# Altium PCB RUMBA_V2.PcbDoc (part 2 of 2)
Units mm, origin at the board's own origin, x right, y up, seen from the top; angles counter-clockwise.
Board outline 135 x 75 mm, 2 copper layers (Top Layer, Bottom Layer); 186 components, 178 nets, 812 pads, 160 vias.
Unrouted connection lines stored in the file: 153.
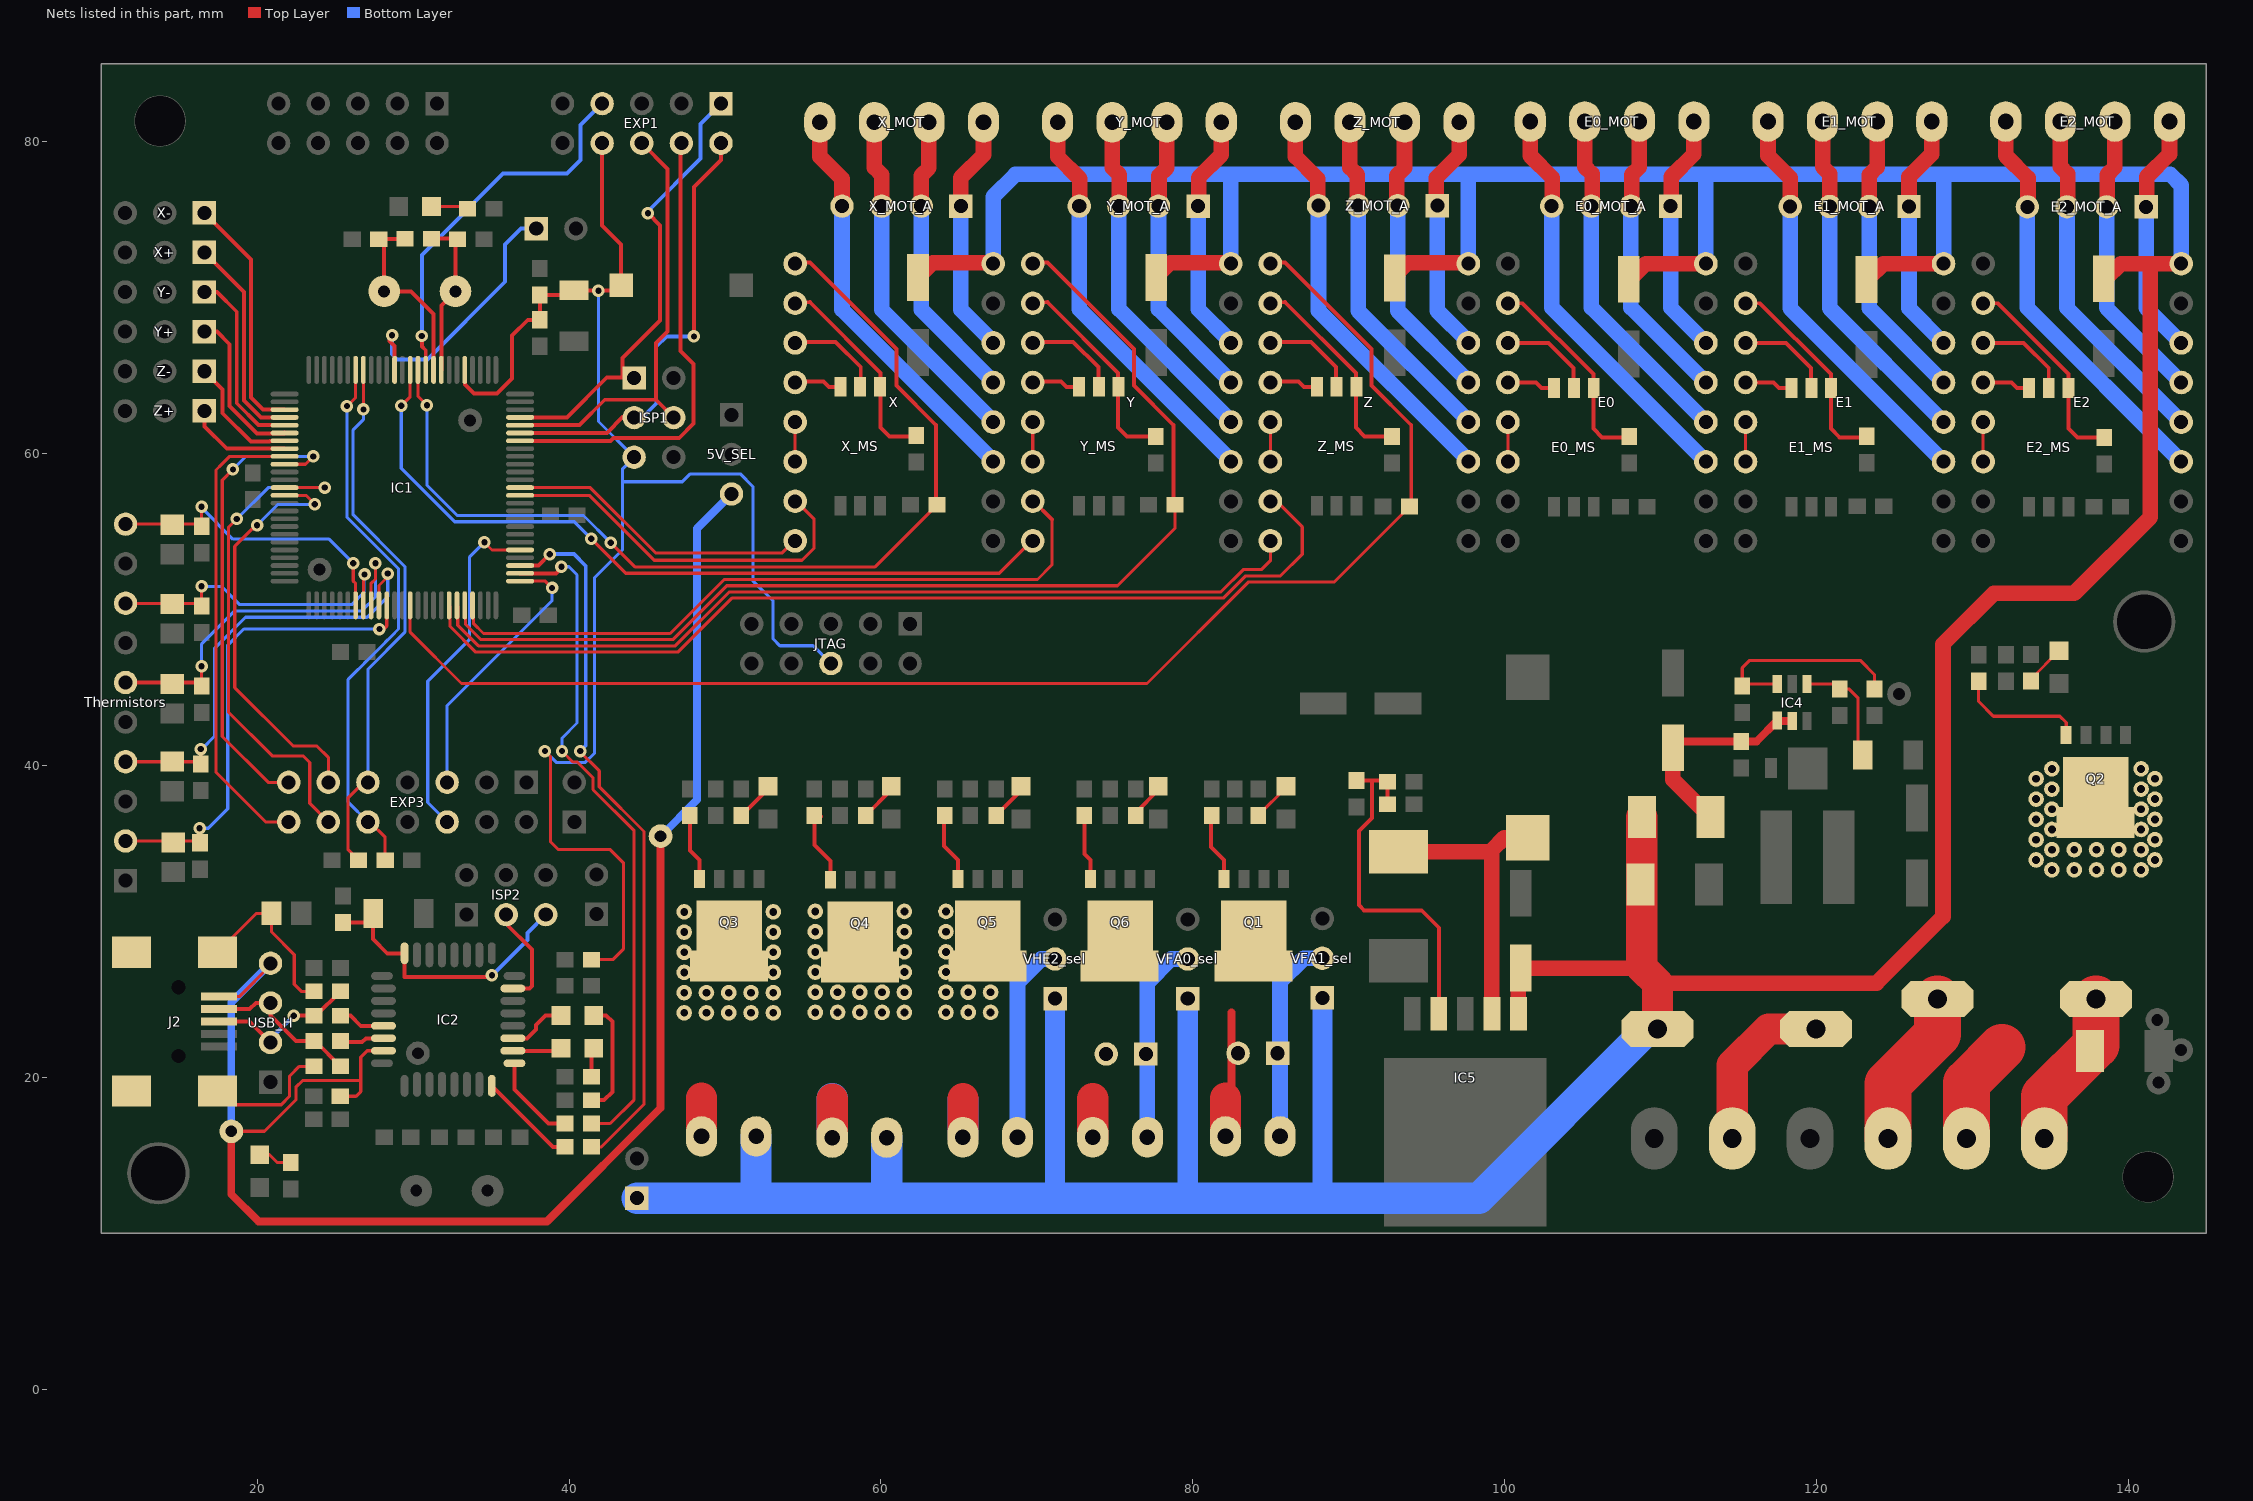
[diagram p2: the nets of this part, all layers, seen from the top]

## Via types
v1: diameter 0.8, hole 0.4, Top Layer to Bottom Layer, tented both sides, 160 vias

## Nets (pads, with @x,y where several pads share a name; then routed paths per layer and width w, separated by ;. In a path a pad name is that pad's centre, name@x,y a point inside that pad or via, vN(x,y) a via of type N, cw(c..) or ccw(c..) an arc to the next point about the centre after c; other vN are vias at no path point) (continued)
NetC18_2: C18.2 D4.2 IC4.1 | length 7.6
  Top Layer w0.2: IC4.1@119.39,45.219 121.163,45.219 C18.2@121.488,44.894 122.111,44.894 122.657,44.348 122.657,41.123 D4.2@123.165,40.615
NetC19_2: C19.2 IC1.33 R1.2 Y1.2 | length 10.5
  Top Layer w0.254: R1.2@31.178,73.782 C19.2@32.563,73.782 ; IC1.33@31.81,65.367 31.81,69.498 Y1.2@32.716,70.404 32.716,73.629 C19.2@32.563,73.782 ; C19.2@32.819,73.782 C19.2@32.563,73.782
NetC20_2: C20.2 IC1.34 R1.1 Y1.1 | length 12.4
  Top Layer w0.254: C20.2@27.799,73.752 C20.2@28.092,73.752 ; R1.1@29.448,73.752 C20.2@28.092,73.752 ; IC1.34@31.31,65.367 31.31,68.95 29.856,70.404 Y1.1@28.144,70.404 28.144,73.701 C20.2@28.092,73.752
NetC33_2: C33.2 IC5.4 R56.1 R57.1 | length 22.9
  Top Layer w0.254: R56.1@90.5,39.026 R57.1@92.433,39.026 ; 91.491,38.964 91.491,36.627 90.653,35.789 90.653,31.039 90.983,30.709 94.666,30.709 95.786,29.588 IC5.4@95.786,24.074 ; C33.2@92.496,37.516 R57.1@92.496,38.964
NetD8_2: D8.2 IC5.2 L4.1 | length 19.2
  Top Layer w0.254: 99.08,34.463 99.186,34.568
  Top Layer w1: D8.2@93.193,34.463 99.08,34.463 ; IC5.2@99.186,24.074 99.186,34.568 99.974,35.357 L4.1@101.498,35.357
NetE0_2: E0.2 E0_MS.1 R28.1 | length 13.4
  Top Layer w0.2: E0.2@100.211,69.636 101.153,69.636
  Top Layer w0.254: 101.153,69.636 105.688,65.102 105.688,64.204 105.688,61.596 106.252,61.032 R28.1@107.967,61.032
NetE0_3: E0.3 E0_MS.2 | length 6.2
  Top Layer w0.254: E0.3@100.211,67.096 102.804,67.096 104.418,65.483 E0_MS.2@104.418,64.204
NetE0_4: E0.4 E0_MS.3 | length 3.1
  Top Layer w0.254: E0.4@100.211,64.556 102.017,64.556 102.37,64.204 E0_MS.3@103.148,64.204
NetE0_5: E0.5 E0.6 | length 2.5
  Top Layer w0.2: E0.6@100.211,59.476 E0.5@100.211,62.016
NetE0_11: E0.11 E0_MOT.1 E0_MOT_A.4 | length 26.5
  Top Layer w1: E0_MOT.1@101.643,81.295 101.643,79.098 103.068,77.673 E0_MOT_A.4@103.068,75.921
  Bottom Layer w1: E0_MOT_A.4@103.022,75.87 103.022,69.365 E0.11@112.911,59.476
NetE0_12: E0.12 E0_MOT.2 E0_MOT_A.3 | length 22.5
  Top Layer w1: E0_MOT.2@105.143,81.295 105.143,78.392 105.608,77.927 E0_MOT_A.3@105.608,75.921
  Bottom Layer w1: E0_MOT_A.3@105.562,75.87 105.562,69.365 E0.12@112.911,62.016
NetE0_13: E0.13 E0_MOT.3 E0_MOT_A.2 | length 18.9
  Top Layer w1: E0_MOT_A.2@108.148,75.921 108.148,77.876 108.643,78.372 E0_MOT.3@108.643,81.295
  Bottom Layer w1: E0_MOT_A.2@108.102,75.87 108.102,69.365 E0.13@112.911,64.556
NetE0_14: E0.14 E0_MOT.4 E0_MOT_A.1 | length 15.7
  Top Layer w1: E0_MOT_A.1@110.688,75.921 110.688,77.749 112.143,79.205 E0_MOT.4@112.143,81.295
  Bottom Layer w1: E0_MOT_A.1@110.642,75.87 110.642,69.365 E0.14@112.911,67.096
NetE1_2: E1.2 E1_MS.1 R30.1 | length 13.4
  Top Layer w0.2: E1.2@115.451,69.636 116.393,69.636
  Top Layer w0.254: 116.393,69.636 120.928,65.102 120.928,64.204 120.928,61.596 121.492,61.032 R30.1@123.207,61.032
NetE1_3: E1.3 E1_MS.2 | length 6.2
  Top Layer w0.254: E1.3@115.451,67.096 118.044,67.096 119.658,65.483 E1_MS.2@119.658,64.204
NetE1_4: E1.4 E1_MS.3 | length 3.1
  Top Layer w0.254: E1.4@115.451,64.556 117.257,64.556 117.61,64.204 E1_MS.3@118.388,64.204
NetE1_5: E1.5 E1.6 | length 2.5
  Top Layer w0.2: E1.6@115.451,59.476 E1.5@115.451,62.016
NetE1_11: E1.11 E1_MOT.1 E1_MOT_A.4 | length 26.4
  Top Layer w1: E1_MOT.1@116.893,81.295 116.893,79.098 118.318,77.673 E1_MOT_A.4@118.318,75.921
  Bottom Layer w1: E1_MOT_A.4@118.313,75.844 118.313,69.314 E1.11@128.151,59.476
NetE1_12: E1.12 E1_MOT.2 E1_MOT_A.3 | length 22.4
  Top Layer w1: E1_MOT.2@120.393,81.295 120.393,78.392 120.858,77.927 E1_MOT_A.3@120.858,75.921
  Bottom Layer w1: E1_MOT_A.3@120.853,75.844 120.853,69.314 E1.12@128.151,62.016
NetE1_13: E1.13 E1_MOT.3 E1_MOT_A.2 | length 18.8
  Top Layer w1: E1_MOT_A.2@123.398,75.921 123.398,77.876 123.893,78.372 E1_MOT.3@123.893,81.295
  Bottom Layer w1: E1_MOT_A.2@123.393,75.844 123.393,69.314 E1.13@128.151,64.556
NetE1_14: E1.14 E1_MOT.4 E1_MOT_A.1 | length 15.6
  Top Layer w1: E1_MOT_A.1@125.938,75.921 125.938,77.749 127.393,79.205 E1_MOT.4@127.393,81.295
  Bottom Layer w1: E1_MOT_A.1@125.933,75.844 125.933,69.314 E1.14@128.151,67.096
NetE2_2: E2.2 E2_MS.1 R44.1 | length 13.4
  Top Layer w0.2: E2.2@130.691,69.636 131.633,69.636
  Top Layer w0.254: 131.633,69.636 136.168,65.102 E2_MS.1@136.168,64.204 136.168,61.596 136.732,61.032 R44.1@138.447,61.032
NetE2_3: E2.3 E2_MS.2 | length 6.2
  Top Layer w0.254: E2.3@130.691,67.096 133.284,67.096 134.898,65.483 E2_MS.2@134.898,64.204
NetE2_4: E2.4 E2_MS.3 | length 3.1
  Top Layer w0.254: E2.4@130.691,64.556 132.497,64.556 132.85,64.204 E2_MS.3@133.628,64.204
NetE2_5: E2.5 E2.6 | length 2.5
  Top Layer w0.2: E2.6@130.691,59.476 E2.5@130.691,62.016
NetE2_11: E2.11 E2_MOT.1 E2_MOT_A.4 | length 26.4
  Top Layer w1: E2_MOT.1@132.143,81.295 132.143,79.098 133.568,77.673 E2_MOT_A.4@133.568,75.921
  Bottom Layer w1: E2_MOT_A.4@133.528,75.819 133.528,69.339 E2.11@143.391,59.476
NetE2_12: E2.12 E2_MOT.2 E2_MOT_A.3 | length 22.4
  Top Layer w1: E2_MOT.2@135.643,81.295 135.643,78.392 136.108,77.927 E2_MOT_A.3@136.108,75.921
  Bottom Layer w1: E2_MOT_A.3@136.068,75.819 136.068,69.339 E2.12@143.391,62.016
NetE2_13: E2.13 E2_MOT.3 E2_MOT_A.2 | length 18.8
  Top Layer w1: E2_MOT_A.2@138.648,75.921 138.648,77.876 139.143,78.372 E2_MOT.3@139.143,81.295
  Bottom Layer w1: E2_MOT_A.2@138.608,75.819 138.608,69.339 E2.13@143.391,64.556
NetE2_14: E2.14 E2_MOT.4 E2_MOT_A.1 | length 15.6
  Top Layer w1: E2_MOT_A.1@141.188,75.921 141.188,77.749 142.643,79.205 E2_MOT.4@142.643,81.295
  Bottom Layer w1: E2_MOT_A.1@141.148,75.819 141.148,69.339 E2.14@143.391,67.096
NetF1_1: F1.1 HB-PWR.2 | length 10.3
  Top Layer w3: HB-PWR.2@124.583,16.078 124.583,19.58 127.762,22.758 F1.1@127.762,25.019
NetF2_1: F2.1 MAIN-PWR.2 | length 11
  Top Layer w2: MAIN-PWR.2@114.601,16.078 114.601,20.773 116.916,23.089 F2.1@119.964,23.089
NetFAN0_1: FAN0.1 FAN0_1.1 VFA0_sel.2 | length 13
  Bottom Layer w1: FAN0.1@77.089,16.154 77.089,26.06 78.613,27.584 VFA0_sel.2@79.502,27.584
NetFAN0_2: FAN0.2 FAN0_1.2 Q6.2 | length 2.5
  Top Layer w2: FAN0.2@73.589,16.154 73.589,18.623
NetFAN1_1: FAN1.1 FAN1_1.1 VFA1_sel.2 | length 13
  Bottom Layer w1: FAN1.1@85.598,16.205 85.598,26.111 87.122,27.635 VFA1_sel.2@88.011,27.635
NetFAN1_2: FAN1.2 FAN1_1.2 Q1.2 | length 8.1
  Top Layer w0.5: 82.098,18.674 82.493,19.069 82.493,24.155
  Top Layer w2: FAN1.2@82.098,16.205 82.098,18.674
NetHB-OUT_1: HB-OUT.1 pad.2@134.087,33.934 pad.2@134.087,35.236 pad.2@134.087,36.538 pad.2@134.087,37.84 pad.2@134.087,39.141 pad.2@135.103,33.299 pad.2@135.103,34.595 pad.2@135.103,35.89 pad.2@135.103,37.186 pad.2@135.103,38.481 pad.2@135.103,39.776 pad.2@136.531,33.299 pad.2@136.531,34.595 pad.2@137.96,33.299 pad.2@137.96,34.595 pad.2@139.389,33.299 pad.2@139.389,34.595 pad.2@140.818,33.299 pad.2@140.818,34.595 pad.2@140.818,35.89 pad.2@140.818,37.186 pad.2@140.818,38.481 pad.2@140.818,39.776 pad.2@141.707,33.934 pad.2@141.707,35.236 pad.2@141.707,36.538 pad.2@141.707,37.84 pad.2@141.707,39.141 Q2.2 | length 6.8
  Top Layer w3: HB-OUT.1@129.616,16.078 129.616,19.634 131.902,21.92
NetHE0_2: HE0.2 pad.2@47.384,24.13 pad.2@47.384,25.425 pad.2@47.384,26.721 pad.2@47.384,28.016 pad.2@47.384,29.312 pad.2@47.384,30.607 pad.2@48.812,24.13 pad.2@48.812,25.425 pad.2@50.241,24.13 pad.2@50.241,25.425 pad.2@51.67,24.13 pad.2@51.67,25.425 pad.2@53.099,24.13 pad.2@53.099,25.425 pad.2@53.099,26.721 pad.2@53.099,28.016 pad.2@53.099,29.312 pad.2@53.099,30.607 Q3.2 | length 4.9
  Top Layer w2: HE0.2@48.494,16.205 48.494,18.674
  Bottom Layer w2: HE0.2@48.494,16.205 48.494,18.613
NetHE1_2: HE1.2 pad.2@55.791,24.155 pad.2@55.791,25.451 pad.2@55.791,26.746 pad.2@55.791,28.042 pad.2@55.791,29.337 pad.2@55.791,30.632 pad.2@57.22,24.155 pad.2@57.22,25.451 pad.2@58.649,24.155 pad.2@58.649,25.451 pad.2@60.077,24.155 pad.2@60.077,25.451 pad.2@61.506,24.155 pad.2@61.506,25.451 pad.2@61.506,26.746 pad.2@61.506,28.042 pad.2@61.506,29.337 pad.2@61.506,30.632 Q4.2 | length 5
  Top Layer w2: HE1.2@56.876,16.129 56.876,18.598
  Bottom Layer w2: HE1.2@56.876,16.129 56.876,18.638
NetHE2_1: HE2.1 VHE2_sel.2 | length 13
  Bottom Layer w1: HE2.1@68.758,16.154 68.758,26.06 70.282,27.584 VHE2_sel.2@71.171,27.584
NetHE2_2: HE2.2 pad.2@64.173,24.155 pad.2@64.173,25.451 pad.2@64.173,26.746 pad.2@64.173,28.042 pad.2@64.173,29.337 pad.2@64.173,30.632 pad.2@65.602,24.155 pad.2@65.602,25.451 pad.2@67.031,24.155 pad.2@67.031,25.451 Q5.2 | length 4.9
  Top Layer w2: HE2.2@65.258,16.154 65.258,18.623
  Bottom Layer w2: HE2.2@65.258,16.154 65.258,18.573
NetIC2_8: IC2.8 R17.1 | length 6.3
  Top Layer w0.254: IC2.8@35.048,19.447 35.055,19.447 38.97,15.531 R17.1@39.734,15.531
NetIC2_9: IC2.9 R18.1 | length 5.8
  Top Layer w0.254: IC2.9@36.498,20.897 36.498,19.204 38.671,17.031 R18.1@39.734,17.031
NetIC2_10: IC2.10 RX.2 | length 3.2
  Top Layer w0.254: IC2.10@36.398,21.697 39.329,21.697 RX.2@39.489,21.857
NetIC2_11: IC2.11 TX.2 | length 3.9
  Top Layer w0.254: IC2.11@36.398,22.497 37.305,22.497 37.871,23.063 37.871,23.343 38.494,23.966 TX.2@39.489,23.966
NetIC2_29: IC2.29 R8.1 | length 3
  Top Layer w0.254: R8.1@25.348,23.947 25.99,23.947 26.64,23.297 IC2.29@28.098,23.297
NetIC2_30: IC2.30 R7.1 | length 2.9
  Top Layer w0.254: R7.1@25.348,22.324 25.421,22.25 26.721,22.25 26.967,22.497 IC2.30@28.098,22.497
NetIC4_3: IC4.3 R5.1 R6.2 | length 13.4
  Top Layer w0.2: R6.2@115.24,45.097 115.24,46.253 115.722,46.736 122.809,46.736 123.723,45.822 R5.1@123.723,44.894 ; R6.2@115.362,45.219 IC4.3@117.49,45.219
  Top Layer w0.5: R6.2@115.24,45.097 R6.2@115.362,45.219
NetJ2_0: J2.0 L1.1 Z1.2 Z2.2 | length 19.4
  Top Layer w0.2: J2.0@17.453,19.121 17.734,19.121 18.618,18.237 21.539,18.237 22.073,18.771 22.073,20.066 22.703,20.697 Z1.2@23.648,20.697 ; J2.0@17.453,28.021 19.937,30.505 L1.1@20.919,30.505 20.919,29.322 22.377,27.864 22.377,25.959 22.828,25.508 Z2.2@23.638,25.508
NetJ2_2: J2.2 R7.2 USB_H.3 Z1.1 | length 10.1
  Top Layer w0.254: J2.2@17.553,24.371 19.52,24.371 19.914,24.765 USB_H.3@20.853,24.765 20.853,23.952 22.482,22.324 R7.2@23.648,22.324 23.721,22.324 Z1.1@25.348,20.697
NetJ2_3: J2.3 R8.2 USB_H.2 Z2.1 | length 9.8
  Top Layer w0.254: J2.3@17.553,23.571 19.507,23.571 USB_H.2@20.853,22.225 ; v1(22.346,23.947) R8.2@23.648,23.947 23.776,23.947 Z2.1@25.338,25.508
  Bottom Layer w0.254: USB_H.2@20.853,22.225 20.853,22.454 v1(22.346,23.947)
NetLD2_1: LD2.1 R33.2 | length 2.7
  Top Layer w0.2: R33.2@133.756,45.403 133.756,45.542 LD2.1@135.56,47.346
NetLD3_1: LD3.1 R36.2 | length 2.6
  Top Layer w0.254: R36.2@51.053,36.793 52.756,38.496 LD3.1@52.756,38.659
NetLD4_1: LD4.1 R39.2 | length 2.5
  Top Layer w0.254: R39.2@59.029,36.793 60.658,38.422 LD4.1@60.658,38.659
NetLD5_1: LD5.1 R50.2 | length 2.5
  Top Layer w0.254: R50.2@67.386,36.793 68.99,38.397 LD5.1@68.99,38.659
NetLD6_1: LD6.1 R53.2 | length 2.5
  Top Layer w0.254: R53.2@76.352,36.793 76.352,36.98 77.778,38.406 LD6.1@77.778,38.659
NetLD7_1: LD7.1 R55.2 | length 2.6
  Top Layer w0.2: R55.2@84.201,36.793 LD7.1@85.979,38.571
  Top Layer w0.5: LD7.1@85.979,38.571 LD7.1@85.979,38.659
NetLED1_1: LED1.1 R13.1 | length 2.1
  Top Layer w0.2: LED1.1@31.183,75.844 R13.1@33.33,75.844
NetPower_1: Power.1 R4.1 | length 2.2
  Top Layer w0.2: Power.1@20.168,15.029 20.785,15.029 21.273,14.541 R4.1@22.149,14.541
NetQ1_1: Q1.1 R46.2 | length 4.5
  Top Layer w0.254: R46.2@81.404,36.793 81.178,36.568 81.178,34.77 82.017,33.932 Q1.1@82.017,32.727
NetQ2_1: Q2.1 R31.2 | length 8.3
  Top Layer w0.2: R31.2@130.404,45.392 130.404,44.094 131.343,43.155 135.611,43.155 136.017,42.748 Q2.1@136.017,41.935
NetQ3_1: Q3.1 R34.2 | length 4.3
  Top Layer w0.254: R34.2@47.751,36.793 47.751,34.545 48.364,33.932 Q3.1@48.364,32.727
NetQ4_1: Q4.1 R37.2 | length 4.7
  Top Layer w0.254: R37.2@56.156,36.73 55.753,36.327 55.753,34.885 56.769,33.869 Q4.1@56.769,32.664
NetQ5_1: Q5.1 R48.2 | length 4.5
  Top Layer w0.254: R48.2@64.336,36.793 64.059,36.516 64.059,34.822 64.949,33.932 Q5.1@64.949,32.727
NetQ6_1: Q6.1 R51.2 | length 4.3
  Top Layer w0.254: R51.2@72.819,36.793 73.05,36.561 73.05,34.313 73.432,33.932 Q6.1@73.432,32.727
NetR15_2: R15.2 TX.1 | length 7.4
  Top Layer w0.254: R15.2@41.434,18.531 42.254,18.531 42.774,19.05 42.774,23.571 42.379,23.966 TX.1@41.589,23.966
NetR16_2: R16.2 RX.1 | length 1.7
  Top Layer w0.254: R16.2@41.434,20.031 RX.1@41.434,21.702
NetR22_1: R22.1 X.2 X_MS.1 | length 13.4
  Top Layer w0.2: X.2@54.499,69.705 55.442,69.705
  Top Layer w0.254: 55.442,69.705 59.976,65.17 59.976,64.272 59.976,61.665 60.541,61.101 R22.1@62.255,61.101
NetR24_1: R24.1 Y.2 Y_MS.1 | length 13.4
  Top Layer w0.2: Y.2@69.739,69.705 70.682,69.705
  Top Layer w0.254: 70.682,69.705 75.216,65.17 75.216,64.272 75.216,61.665 75.781,61.101 R24.1@77.495,61.101
NetR26_1: R26.1 Z.2 Z_MS.1 | length 13.4
  Top Layer w0.2: Z.2@84.979,69.705 85.922,69.705
  Top Layer w0.254: 85.922,69.705 90.456,65.17 90.456,64.272 90.456,61.665 91.021,61.101 R26.1@92.735,61.101
NetX_3: X.3 X_MS.2 | length 6.2
  Top Layer w0.254: X.3@54.499,67.165 57.093,67.165 58.706,65.551 X_MS.2@58.706,64.272
NetX_4: X.4 X_MS.3 | length 3.1
  Top Layer w0.254: X.4@54.499,64.625 56.305,64.625 56.658,64.272 X_MS.3@57.436,64.272
NetX_5: X.5 X.6 | length 2.5
  Top Layer w0.2: X.6@54.499,59.545 X.5@54.499,62.085
NetX_11: X.11 X_MOT.1 X_MOT_A.4 | length 26.3
  Top Layer w1: X_MOT.1@56.081,81.244 56.081,79.047 57.506,77.622 X_MOT_A.4@57.506,75.87
  Bottom Layer w1: X_MOT_A.4@57.506,75.87 57.506,69.238 X.11@67.199,59.545
NetX_12: X.12 X_MOT.2 X_MOT_A.3 | length 22.3
  Top Layer w1: X_MOT.2@59.581,81.244 59.581,78.341 60.046,77.876 X_MOT_A.3@60.046,75.87
  Bottom Layer w1: X_MOT_A.3@60.046,75.87 60.046,69.238 X.12@67.199,62.085
NetX_13: X.13 X_MOT.3 X_MOT_A.2 | length 18.7
  Top Layer w1: X_MOT_A.2@62.586,75.87 62.586,77.826 63.081,78.321 X_MOT.3@63.081,81.244
  Bottom Layer w1: X_MOT_A.2@62.586,75.87 62.586,69.238 X.13@67.199,64.625
NetX_14: X.14 X_MOT.4 X_MOT_A.1 | length 15.5
  Top Layer w1: X_MOT_A.1@65.126,75.87 65.126,77.699 66.581,79.154 X_MOT.4@66.581,81.244
  Bottom Layer w1: X_MOT_A.1@65.126,75.87 65.126,69.238 X.14@67.199,67.165
NetY_3: Y.3 Y_MS.2 | length 6.2
  Top Layer w0.254: Y.3@69.739,67.165 72.333,67.165 73.946,65.551 Y_MS.2@73.946,64.272
NetY_4: Y.4 Y_MS.3 | length 3.1
  Top Layer w0.254: Y.4@69.739,64.625 71.545,64.625 71.898,64.272 Y_MS.3@72.676,64.272
NetY_5: Y.5 Y.6 | length 2.5
  Top Layer w0.2: Y.6@69.739,59.545 Y.5@69.739,62.085
NetY_11: Y.11 Y_MOT.1 Y_MOT_A.4 | length 28.1
  Top Layer w1: Y_MOT.1@71.331,81.244 71.331,79.047 72.756,77.622 ; 72.756,77.622 72.756,75.87 72.756,77.622
  Bottom Layer w1: Y_MOT_A.4@72.72,75.87 72.72,69.264 Y.11@82.439,59.545
NetY_12: Y.12 Y_MOT.2 Y_MOT_A.3 | length 24.3
  Top Layer w1: Y_MOT.2@74.831,81.244 74.831,78.341 75.296,77.876 ; 75.296,77.876 75.296,75.87 75.296,77.876
  Bottom Layer w1: Y_MOT_A.3@75.26,75.87 75.26,69.264 Y.12@82.439,62.085
NetY_13: Y.13 Y_MOT.3 Y_MOT_A.2 | length 20.7
  Top Layer w1: Y_MOT.3@78.331,81.244 78.331,78.321 77.836,77.826 ; 77.836,77.826 77.836,75.87 77.836,77.826
  Bottom Layer w1: Y_MOT_A.2@77.8,75.87 77.8,69.264 Y.13@82.439,64.625
NetY_14: Y.14 Y_MOT.4 Y_MOT_A.1 | length 17.4
  Top Layer w1: Y_MOT.4@81.831,81.244 81.831,79.154 80.376,77.699 ; 80.376,77.699 80.376,75.87 80.376,77.699
  Bottom Layer w1: Y_MOT_A.1@80.34,75.87 80.34,69.264 Y.14@82.439,67.165
NetZ_3: Z.3 Z_MS.2 | length 6.2
  Top Layer w0.254: Z.3@84.979,67.165 87.573,67.165 89.186,65.551 Z_MS.2@89.186,64.272
NetZ_4: Z.4 Z_MS.3 | length 3.1
  Top Layer w0.254: Z.4@84.979,64.625 86.785,64.625 87.138,64.272 Z_MS.3@87.916,64.272
NetZ_5: Z.5 Z.6 | length 2.5
  Top Layer w0.2: Z.6@84.979,59.545 Z.5@84.979,62.085
NetZ_11: Z.11 Z_MOT.1 Z_MOT_A.4 | length 28.1
  Top Layer w1: Z_MOT.1@86.581,81.244 86.581,79.047 88.006,77.622 ; 88.006,77.622 88.006,75.895 88.006,75.87 88.006,77.622
  Bottom Layer w1: Z_MOT_A.4@88.062,75.895 88.062,69.162 Z.11@97.679,59.545
NetZ_12: Z.12 Z_MOT.2 Z_MOT_A.3 | length 24.3
  Top Layer w1: Z_MOT.2@90.081,81.244 90.081,78.341 90.546,77.876 ; 90.546,77.876 90.546,75.895 90.546,75.87 90.546,77.876
  Bottom Layer w1: Z_MOT_A.3@90.602,75.895 90.602,69.162 Z.12@97.679,62.085
NetZ_13: Z.13 Z_MOT.3 Z_MOT_A.2 | length 20.7
  Top Layer w1: Z_MOT.3@93.581,81.244 93.581,78.321 93.086,77.826 ; 93.086,77.826 93.086,75.895 93.086,75.87 93.086,77.826
  Bottom Layer w1: Z_MOT_A.2@93.142,75.895 93.142,69.162 Z.13@97.679,64.625
NetZ_14: Z.14 Z_MOT.4 Z_MOT_A.1 | length 17.4
  Top Layer w1: Z_MOT.4@97.081,81.244 97.081,79.154 95.626,77.699 ; 95.626,77.699 95.626,75.895 95.626,75.87 95.626,77.699
  Bottom Layer w1: Z_MOT_A.1@95.682,75.895 95.682,69.162 Z.14@97.679,67.165
PB1_(SCK): EXP1.2 IC1.20 ISP1.3 | length 28.2
  Top Layer w0.254: IC1.20@36.86,61.317 42.419,61.317 ISP1.3@43.434,62.332 ; v1(48.006,67.513) 48.006,77.089 49.743,78.826 EXP1.2@49.743,79.904
  Bottom Layer w0.254: ISP1.3@44.171,62.306 44.704,62.306 45.593,63.195 45.593,66.853 46.253,67.513 v1(48.006,67.513)
PB2_(MOSI): EXP1.6 IC1.21 ISP1.4 | length 28.4
  Top Layer w0.254: IC1.21@36.86,61.817 40.659,61.817 42.291,63.449 45.568,63.449 ; EXP1.6@44.663,79.904 46.304,78.262 46.304,67.818 45.568,67.081 45.568,63.449 ; ISP1.4@46.711,62.306 45.568,63.449
PB3_(MISO): EXP1.1 IC1.22 ISP1.1 | length 28.5
  Top Layer w0.254: IC1.22@36.86,62.317 39.863,62.317 42.418,64.872 43.434,64.872 43.434,66.116 45.847,68.529 45.847,74.625 v1(45.06,75.413)
  Bottom Layer w0.254: v1(45.06,75.413) 45.06,75.54 48.438,78.918 48.438,81.139 EXP1.1@49.743,82.444
PC6: EXP3.14 IC1.59 | length 30.5
  Top Layer w0.2: 17.983,59.563 17.729,59.309 ; IC1.59@21.76,59.817 18.237,59.817 17.729,59.309 ; EXP3.14@22.022,36.373 20.549,36.373 17.36,39.561 17.36,58.94 17.729,59.309
PC7: EXP3.13 IC1.60 | length 30.4
  Top Layer w0.2: v1(18.44,58.979) 17.76,58.298 17.76,45.237 17.76,41.854 20.701,38.913 EXP3.13@22.022,38.913 ; IC1.60@21.76,59.317 23.097,59.317 v1(23.597,59.817)
  Bottom Layer w0.2: v1(18.44,58.979) 19.279,59.817 v1(23.597,59.817)
PJ0: EXP3.12 IC1.63 | length 33.3
  Top Layer w0.2: v1(18.694,55.804) 18.16,55.269 18.16,43.41 20.955,40.615 21.59,40.615 ; IC1.63@21.76,57.817 v1(24.327,57.817) ; 22.377,40.615 21.59,40.615 ; EXP3.12@24.562,36.373 23.368,37.567 23.368,40.183 22.936,40.615 21.59,40.615
  Bottom Layer w0.2: v1(18.694,55.804) 20.708,57.817 v1(24.327,57.817)
PJ1: EXP3.11 IC1.64 | length 27.1
  Top Layer w0.2: v1(19.99,55.397) 19.99,55.169 19.685,55.169 18.56,54.044 18.56,44.991 22.303,41.248 23.827,41.248 24.562,40.513 EXP3.11@24.562,38.913 ; IC1.64@21.76,57.317 23.125,57.317 v1(23.698,56.744)
  Bottom Layer w0.2: v1(19.99,55.397) 21.336,56.744 v1(23.698,56.744)
PS_ON: IC1.39 PS_ON.1 | length 17.9
  Top Layer w0.254: v1(28.651,67.586) 28.489,67.424 28.489,67.206 28.81,66.885 IC1.39@28.81,65.367
  Bottom Layer w0.254: v1(28.651,67.586) 28.651,66.37 28.981,66.04 30.912,66.04 35.89,71.018 35.89,73.406 36.906,74.422 PS_ON.1@37.897,74.422
PWM_1: EXP3.5 IC1.1 | length 17.5
  Top Layer w0.2: IC1.1@36.86,51.817 38.48,51.817 v1(38.913,51.384)
  Bottom Layer w0.2: EXP3.5@32.182,38.913 32.182,43.84 38.913,50.571 v1(38.913,51.384)
PWM_2: EXP3.6 IC1.5 | length 22.4
  Top Layer w0.2: v1(34.569,54.305) 35.058,53.817 IC1.5@36.86,53.817
  Bottom Layer w0.2: EXP3.6@32.182,36.373 30.937,37.617 30.937,45.394 33.604,48.061 33.604,53.34 v1(34.569,54.305)
RESET: C8.2 C16.1 D2.1 EXP1.8 IC1.30 ISP1.5 JTAG.6 R11.1 Reset.2 | length 104.6
  Top Layer w0.2: v1(38.456,40.919) 38.811,40.564 38.811,35.103 39.319,34.595 42.647,34.595 43.485,33.757 43.485,28.219 42.811,27.546 C16.1@41.45,27.546
  Top Layer w0.254: IC1.30@33.31,65.367 33.333,65.344 33.333,64.419 33.612,64.14 33.625,64.14 33.909,63.856 35.382,63.856 36.347,64.821 36.347,67.564 37.362,68.579 R11.1@38.132,68.579 C8.2@38.132,70.162 ; C8.2@38.125,70.168 40.026,70.168 D2.1@40.324,70.467 Reset.2@43.307,70.467 ; EXP1.8@42.123,79.904 42.123,74.627 43.343,73.406 Reset.2@43.343,70.79
  Bottom Layer w0.2: v1(38.456,40.919) 39.181,40.194 41.043,40.194 41.64,40.791 41.64,42.164 ; 41.64,41.648 41.64,42.164 ; v1(41.885,70.434) 41.885,62.052 ISP1.5@44.171,59.766 43.434,59.03 43.434,58.191 ; JTAG.6@56.794,46.533 55.651,47.676 53.518,47.676 53.086,48.108 53.086,50.546 51.791,51.841 51.791,57.887 50.978,58.699 47.777,58.699 47.269,58.191 43.434,58.191 ; 41.64,42.164 41.64,52.054 43.434,53.848 43.434,58.191
RESET2: D3.1 IC2.24 ISP2.5 R12.1 | length 17.9
  Top Layer w0.254: R12.1@25.502,29.935 D3.1@26.862,29.935 ; D3.1@27.433,30.505 27.433,28.854 28.34,27.947 IC2.24@29.448,27.947 29.448,26.432 34.941,26.432 v1(35.052,26.543)
  Bottom Layer w0.254: v1(35.052,26.543) 35.077,26.543 37.338,28.804 37.338,29.261 ISP2.5@38.506,30.429
SCK2: IC2.15 ISP2.3 | length 6.5
  Top Layer w0.254: ISP2.3@35.966,30.429 35.966,29.845 37.617,28.194 37.617,25.857 37.457,25.697 IC2.15@36.398,25.697
SCL: EXP3.9 IC1.43 R3.1 | length 35.1
  Top Layer w0.2: R3.1@26.504,33.909 25.832,34.581 25.832,37.922 26.822,38.913 EXP3.9@27.102,38.913 ; v1@26.797,62.814 v1(26.81,62.827) IC1.43@26.81,65.367
  Bottom Layer w0.2: v1(26.81,62.827) 26.81,62.173 26.156,61.519 26.156,56.071 29.472,52.755 29.472,48.547 27.102,46.177 EXP3.9@27.102,38.862
SD_CSEL: EXP1.4 IC1.19 | length 29.9
  Top Layer w0.254: IC1.19@36.86,60.817 42.656,60.817 42.85,61.011 46.66,61.011 47.066,61.011 47.981,61.925 47.981,65.735 47.142,66.573 47.142,79.844 EXP1.4@47.203,79.904
SD_DET: EXP1.7 IC1.35 | length 24.4
  Top Layer w0.254: v1(30.556,67.539) 30.556,66.878 30.81,66.624 IC1.35@30.81,65.367
  Bottom Layer w0.254: v1(30.556,67.539) 30.556,72.746 35.763,77.953 39.878,77.953 40.742,78.816 40.742,81.063 EXP1.7@42.123,82.444
SDA: EXP3.10 IC1.44 R2.1 | length 36.4
  Top Layer w0.2: v1(25.756,63.043) 26.31,63.597 IC1.44@26.31,65.367 ; EXP3.10@27.102,36.373 27.229,36.373 28.208,35.394 R2.1@28.208,33.909
  Bottom Layer w0.2: v1(25.756,63.043) 25.756,55.905 29.058,52.603 ; 26.899,46.584 27.165,46.85 ; EXP3.10@27.102,36.373 25.832,37.643 25.832,45.517 27.165,46.85 ; 28.219,47.904 28.608,48.293 ; 29.058,52.603 29.072,52.589 29.072,52.009 29.058,51.994 29.058,48.743 28.608,48.293 ; 27.165,46.85 28.608,48.293
THERM0: C29.2 IC1.82 R43.2 Thermistors.10 | length 20.9
  Top Layer w0.2: Thermistors.10@11.557,55.474 R43.2@16.75,55.474 ; C29.2@14.361,55.626 C29.2@14.554,55.433 C29.2@14.654,55.333 ; R43.2@16.434,55.333 v1(16.434,56.589) ; v1(26.162,52.959) 26.162,51.816 26.31,51.668 IC1.82@26.31,50.267
  Bottom Layer w0.2: v1(16.434,56.589) 16.434,56.515 18.44,54.508 24.613,54.508 v1(26.162,52.959)
THERM1: C28.2 IC1.83 R42.2 Thermistors.8 | length 21.6
  Top Layer w0.2: Thermistors.8@11.557,50.394 16.268,50.394 R42.2@16.434,50.228 v1(16.434,51.484) ; C28.2@14.107,50.8 C28.2@14.554,50.353 ; IC1.83@26.81,50.267 v1@26.81,52.451
  Bottom Layer w0.2: v1@16.485,51.484 17.706,51.484 18.879,50.311 26.06,50.311 26.848,51.098 26.848,52.212 v1(26.883,52.247) ; v1@26.608,52.287 v1@26.772,52.451
THERM2: C27.2 IC1.84 R41.2 Thermistors.6 | length 25.3
  Top Layer w0.2: R41.2@16.434,45.097 v1(16.434,46.353) ; IC1.84@27.31,50.267 27.31,51.684 27.584,51.958 v1(27.584,52.959)
  Top Layer w0.254: Thermistors.6@11.728,45.142 Thermistors.6@11.557,45.314 16.217,45.314 R41.2@16.434,45.097
  Bottom Layer w0.2: 16.421,47.765 18.567,49.911 26.695,49.911 27.584,50.8 v1(27.584,52.959) ; v1(16.434,46.353) 16.434,47.765
THERM3: C26.2 IC1.85 R40.2 Thermistors.4 | length 28.6
  Top Layer w0.2: Thermistors.4@11.557,40.234 16.242,40.234 R40.2@16.383,40.093 v1(16.383,41.046) ; IC1.85@27.81,50.267 27.81,51.534 v1@28.296,52.019
  Bottom Layer w0.2: v1(16.383,41.046) 16.434,41.046 17.272,41.885 17.272,42.238 17.272,47.523 19.25,49.501 27.048,49.501 28.372,50.825 v1(28.372,52.299)
THERM4: C9.2 IC1.86 R54.2 Thermistors.2 | length 29.9
  Top Layer w0.2: Thermistors.2@11.557,35.154 R54.2@16.217,35.154 ; v1(27.838,48.743) 27.838,48.463 28.31,48.935 ; 28.31,48.986 IC1.86@28.31,50.267
  Bottom Layer w0.2: v1(16.307,35.966) 16.866,35.966 18.11,37.211 18.11,47.708 19.145,48.743 v1(27.838,48.743)
"USB RXD": IC1.2 R18.2 | length 43.4
  Top Layer w0.2: v1@39.548,40.792 v1(39.548,40.919) 40.248,40.219 40.527,40.219 41.535,39.211 41.535,38.449 44.171,35.814 44.171,18.567 42.634,17.031 R18.2@41.434,17.031
  Top Layer w0.254: IC1.2@36.86,52.317 39.16,52.317 v1@39.37,52.527
  Bottom Layer w0.2: v1(39.513,52.74) 39.996,52.74 40.513,52.222 40.513,42.715 39.548,41.75 v1(39.548,40.919)
USB_TXD: IC1.3 R17.2 | length 45.7
  Top Layer w0.2: v1@40.716,40.894 v1@40.691,40.894 ; v1(40.716,40.919) v1@40.691,40.894 ; R17.2@41.434,15.531 42.074,15.531 44.81,18.267 44.81,35.758 41.935,38.633 41.935,39.649 v1@40.691,40.894
  Top Layer w0.254: IC1.3@36.86,52.817 38.034,52.817 v1(38.76,53.543)
  Bottom Layer w0.254: v1(38.76,53.543) 40.31,53.543 41.072,52.781 41.072,41.275 v1(40.716,40.919)
USBVCC: 5V_SEL.3 C11.2 IC2.31 J2.1 pad.0 pad.1 USB_H.4 | length 108
  Top Layer w0.2: J2.1@17.553,25.171 18.847,25.171 20.853,27.178 USB_H.4@20.853,27.305 ; pad.0@18.339,16.535 20.472,16.535 22.479,18.542 22.479,19.355 22.911,19.787 26.645,19.787 ; C11.2@25.325,18.778 26.348,18.778 26.645,19.075 26.645,19.787 ; IC2.31@28.098,21.697 27.056,21.697 26.645,21.285 26.645,19.787
  Top Layer w0.5: pad.0@18.339,16.535 18.339,12.497 20.091,10.744 38.583,10.744 45.872,18.034 pad.1@45.872,35.458
  Bottom Layer w0.5: pad.0@18.339,16.535 18.339,24.79 USB_H.4@20.853,27.305 ; pad.1@45.872,35.458 48.209,37.795 48.209,55.194 5V_SEL.3@50.419,57.404
VIN: C1.1 C3.2 D1.2 IC4.4 IC4.5 | length 13.2
  Top Layer w0.5: C1.1@111.212,41.541 C3.2@115.189,41.541 116.166,41.541 117.469,42.844 IC4.5@118.44,42.844
  Top Layer w1: C1.1@110.795,41.123 110.795,39.081 D1.2@113.198,36.678
VIN1: C21.1 C22.1 C23.1 C24.1 C25.1 C30.1 C31.1 D1.1 D6.2 E0.16 E1.16 E2.16 F2.2 HE0.1 HE1.1 IC5.1 PWR.1 VFA0_sel.1 VFA1_sel.1 VHE2_sel.1 X.16 Y.16 Z.16 | length 350.7
  Top Layer w1: C21.1@62.374,71.285 63.334,72.245 X.16@67.199,72.245 ; C22.1@77.614,71.285 78.574,72.245 Y.16@82.439,72.245 ; C23.1@92.854,71.285 93.814,72.245 Z.16@97.679,72.245 ; IC5.1@100.886,24.074 100.886,26.846 C31.1@101.041,27.001 108.758,27.001 108.798,27.041 ; C24.1@108.085,71.216 109.045,72.176 E0.16@112.911,72.176 ; 109.804,26.035 123.85,26.035 128.118,30.302 128.118,47.777 131.381,51.041 136.538,51.041 141.402,55.905 141.402,72.176 ; C25.1@123.325,71.216 124.285,72.176 E1.16@128.151,72.176 ; C30.1@138.565,71.216 139.525,72.176 141.402,72.176 ; E2.16@143.391,72.176 141.402,72.176
  Top Layer w2: D1.1@108.798,36.678 108.798,27.041 109.804,26.035 F2.2@109.804,23.089
  Bottom Layer w1: X.16@67.199,72.176 67.199,76.47 68.631,77.902 97.815,77.902 ; Y.16@82.439,72.176 82.439,77.791 ; Z.16@97.679,72.176 97.679,77.766 97.815,77.902 ; E0.16@112.911,72.176 112.911,77.783 113.03,77.902 ; E1.16@128.151,72.176 128.151,77.783 ; E2.16@143.391,72.176 143.391,77.208 142.697,77.902 113.03,77.902 ; 97.815,77.902 113.03,77.902
  Bottom Layer w1.3: 71.171,12.344 VHE2_sel.1@71.171,25.044 ; 79.68,12.497 VFA0_sel.1@79.68,25.044 ; 88.316,12.294 VFA1_sel.1@88.316,25.095
  Bottom Layer w2: PWR.1@44.348,12.243 79.426,12.243 ; 51.994,12.878 HE0.1@51.994,16.205 ; 60.376,12.929 HE1.1@60.376,16.129 ; 79.68,12.497 79.426,12.243 ; 88.316,12.294 88.367,12.243 ; F2.2@109.804,23.089 109.195,23.089 98.349,12.243 88.367,12.243 ; 79.426,12.243 88.367,12.243
VIN2: D7.2 F1.2 HB-OUT.2 | length 10.3
  Top Layer w3: HB-OUT.2@134.616,16.078 134.616,18.757 137.922,22.063 F1.2@137.922,25.019
X-DIR: IC1.13 X.8 | length 19.7
  Top Layer w0.2: IC1.13@36.86,57.817 41.368,57.817 45.573,53.611 53.646,53.611 X.8@54.499,54.465
X-EN: IC1.36 R21.2 X.1 | length 64.2
  Top Layer w0.2: IC1.36@30.31,65.367 30.31,63.67 v1(30.886,63.094) ; v1(42.672,54.28) 44.221,52.73 59.628,52.73 R21.2@63.606,56.708
  Top Layer w0.254: X.1@54.499,72.245 55.442,72.245 60.994,66.693 60.994,64.356 63.534,61.816 63.534,56.877 R21.2@63.31,56.653
  Bottom Layer w0.2: v1(30.886,63.094) 30.886,57.97 32.83,56.026 40.925,56.026 v1(42.672,54.28)
  Bottom Layer w0.254: v1(42.672,54.28) v1@42.672,54.318
X-MAX: IC1.54 X+.1 | length 13.6
  Top Layer w0.254: X+.1@16.612,72.898 19.142,70.368 19.142,63.414 20.243,62.312 21.755,62.312 IC1.54@21.76,62.317 IC1.54@21.737,62.34
X-MIN: IC1.53 X-.1 | length 15.6
  Top Layer w0.254: X-.1@16.612,75.438 19.596,72.454 19.596,63.602 20.381,62.817 IC1.53@21.76,62.817
X-STEP: IC1.12 X.7 | length 24.5
  Top Layer w0.2: IC1.12@36.86,57.317 41.302,57.317 45.462,53.157 54.935,53.157 55.717,53.939 55.717,55.786 X.7@54.499,57.005
Y-DIR: IC1.37 Y.8 | length 51
  Top Layer w0.2: v1(29.235,63.068) 29.81,63.643 IC1.37@29.81,65.367 ; v1(41.428,54.534) v1@41.58,54.382 ; v1@41.478,54.585 41.58,54.483 v1@41.58,54.382 ; Y.8@69.739,54.465 67.598,52.324 43.638,52.324 v1@41.58,54.382
  Bottom Layer w0.2: v1(29.235,63.068) 29.235,59.055 32.664,55.626 40.336,55.626 v1(41.428,54.534)
Y-EN: IC1.96 R23.2 Y.1 | length 71.6
  Top Layer w0.2: IC1.96@33.31,50.267 33.36,50.217 33.36,49.053 34.35,48.063 46.648,48.063 50.108,51.524 75.171,51.524 78.871,55.224 R23.2@78.871,56.708
  Top Layer w0.254: Y.1@69.739,72.245 70.682,72.245 76.234,66.693 76.234,64.356 78.774,61.816 78.774,56.877 R23.2@78.55,56.653
Y-MAX: IC1.56 Y+.1 | length 10.2
  Top Layer w0.254: Y+.1@16.612,67.818 17.424,67.818 18.234,67.008 18.234,63.037 19.982,61.289 20.808,61.289 20.812,61.294 21.737,61.294 IC1.56@21.76,61.317 IC1.56@21.737,61.34
Y-MIN: IC1.55 Y-.1 | length 12.1
  Top Layer w0.254: Y-.1@16.612,70.358 17.424,70.358 18.688,69.094 18.688,63.225 20.073,61.84 21.737,61.84 IC1.55@21.76,61.817
Y-STEP: IC1.97 Y.7 | length 45
  Top Layer w0.2: IC1.97@33.81,50.267 33.86,50.217 33.86,49.119 34.516,48.463 46.482,48.463 49.943,51.924 70.04,51.924 70.968,52.852 70.968,55.776
  Top Layer w0.254: Y.7@69.739,57.005 70.968,55.776
Z-DIR: IC1.95 Z.8 | length 57.6
  Top Layer w0.2: IC1.95@32.81,50.267 32.86,50.217 32.86,48.988 34.185,47.663 46.813,47.663 50.274,51.124 81.801,51.124 83.229,52.552 84.404,52.552 84.979,53.128 Z.8@84.979,54.465
Z-EN: IC1.89 R25.2 Z.1 | length 91.8
  Top Layer w0.2: IC1.89@29.81,50.216 29.81,48.549 33.105,45.254 77.062,45.254 83.56,51.752 89.054,51.752 R25.2@93.908,56.606 ; IC1.89@29.81,50.267 IC1.89@29.833,50.244
  Top Layer w0.254: Z.1@84.979,72.245 85.922,72.245 91.474,66.693 91.474,64.356 94.014,61.816 94.014,56.877 R25.2@93.79,56.653
Z-MAX: IC1.58 Z+.1 | length 6.7
  Top Layer w0.254: Z+.1@16.612,62.738 16.612,61.747 18.047,60.312 21.755,60.312 IC1.58@21.76,60.317
Z-MIN: IC1.57 Z-.1 | length 8
  Top Layer w0.254: Z-.1@16.612,65.278 17.78,64.11 17.78,62.586 19.599,60.766 20.785,60.766 20.812,60.794 21.783,60.794 IC1.57@21.76,60.817
Z-STEP: IC1.94 Z.7 | length 63.8
  Top Layer w0.2: IC1.94@32.31,50.267 32.36,50.217 32.36,48.922 34.019,47.263 46.979,47.263 50.44,50.724 81.966,50.724 83.394,52.152 85.629,52.152 87.02,53.543 87.02,55.296 Z.7@85.312,57.005
  Top Layer w0.254: Z.7@84.979,57.005 Z.7@85.312,57.005
pads on no net: IC1.4 IC1.8 IC1.9 IC1.14 IC1.23 IC1.27 IC1.28 IC1.29 IC1.47 IC1.48 IC1.49 IC1.65 IC1.66 IC1.67 IC1.68 IC1.69 IC1.79 IC2.5 IC2.6 IC2.7 IC2.12 IC2.14 IC2.18 IC2.19 IC2.20 IC2.21 IC2.22 IC2.23 IC2.25 IC2.26 J2.5 J2.MH1 J2.MH2 JTAG.8 sc1.0 sc2.0 sc3.0 sc4.0

## Polygon pours and split planes (outlines as drawn)
NetHB-OUT_1 on Top Layer "Bottom Layer-No Net" (solid, remove dead copper, pour order 1000): 131.061,40.481 144.85,40.481 144.85,14.86 145.491,14.122 145.01,14.675 130.099,14.675 130.099,40.665 130.259,40.481 132.023,40.481
NetHE0_2 on Top Layer "Bottom Layer-No Net" (solid, pour order 1001): 54.432,17.805 46.431,17.805 46.431,31.445 54.432,31.445
NetHE1_2 on Top Layer "Bottom Layer-No Net" (solid, pour order 1001): 62.789,17.805 54.559,17.805 54.559,31.471 62.789,31.471
NetHE2_2 on Top Layer "Bottom Layer-No Net" (solid, pour order 1001): 71.12,17.805 62.916,17.805 62.916,31.471 71.12,31.471
NetFAN0_2 on Top Layer "Bottom Layer-No Net" (solid, pour order 1001): 79.578,17.805 71.272,17.805 71.272,31.471 79.578,31.471
NetFAN1_2 on Top Layer "Bottom Layer-No Net" (solid, pour order 1001): 87.732,17.805 79.68,17.805 79.68,31.471 87.732,31.471
GND on Top Layer "Bottom Layer-No Net" (solid, pour order 1001): 140.386,41.935 140.386,43.586 139.725,44.247 137.262,44.247 137.338,44.247 136.754,43.663 136.754,43.586 136.754,41.935
GND on Top Layer "Bottom Layer-No Net" (solid, pour order 1001): 52.73,32.741 52.73,34.392 52.07,35.052 49.606,35.052 49.682,35.052 49.098,34.468 49.098,34.392 49.098,32.741
GND on Top Layer "Bottom Layer-No Net" (solid, pour order 1001): 61.138,32.69 61.138,34.341 60.477,35.001 58.014,35.001 58.09,35.001 57.506,34.417 57.506,34.341 57.506,32.69
GND on Top Layer "Bottom Layer-No Net" (solid, pour order 1001): 69.317,32.664 69.317,34.315 68.656,34.976 66.192,34.976 66.269,34.976 65.684,34.392 65.684,34.315 65.684,32.664
GND on Top Layer "Bottom Layer-No Net" (solid, pour order 1001): 77.775,32.766 77.775,34.417 77.114,35.077 74.651,35.077 74.727,35.077 74.143,34.493 74.143,34.417 74.143,32.766
GND on Top Layer "Bottom Layer-No Net" (solid, pour order 1001): 86.385,32.766 86.385,34.417 85.725,35.077 83.261,35.077 83.337,35.077 82.753,34.493 82.753,34.417 82.753,32.766
NetHE2_2 on Bottom Layer "Bottom Layer-No Net" (solid, remove dead copper, pour order 1001): 71.171,17.805 63.017,17.805 63.017,31.471 71.171,31.471
NetHE1_2 on Bottom Layer "Bottom Layer-No Net" (solid, pour order 1001): 62.763,17.805 54.534,17.805 54.534,31.471 62.763,31.471
NetHE0_2 on Bottom Layer "Bottom Layer-No Net" (solid, pour order 1001): 54.331,17.805 46.431,17.805 46.431,31.445 54.331,31.445
NetHB-OUT_1 on Bottom Layer "Bottom Layer-No Net" (solid, remove dead copper, pour order 1000): 131.061,40.481 144.85,40.481 144.85,14.86 145.491,14.122 145.01,14.675 130.099,14.675 130.099,40.665 130.259,40.481 132.023,40.481
GND on Mechanical 1 "Bottom Layer-No Net" (solid, remove dead copper, pour order 1000): 10,85 145,85 145,10 10,10
GND on Mechanical 13 "Bottom Layer-No Net" (solid, remove dead copper, pour order 1001): 10,84.785 145,84.785 145,10 144.906,9.906 9.779,9.906

## Keep-outs
Keep-Out Layer:
  circle w0.254: c141.021,49.225 r3.552
  circle w0.254: c13.773,81.325 r3.552
  circle w0.254: c141.275,13.614 r3.552
  circle w0.254: c13.619,13.868 r3.552
  lines w0.254: 139.192,-3.175 139.228,-3.211 ; 10,10 145,10 145,85 10,85 10,10

## Other copper
Top Layer:
  rectangle net GND: 90.78,10.338 104.038,22.301
Bottom Layer:
  rectangle net GND: 48.235,33.246 87.325,35.56
  rectangle net GND: 136.093,42.52 141.021,45.161

## Silkscreen, mask and mechanical layers (free items; w line width, h text height)
Top Overlay:
  drawing of 161 lines, arcs and shapes, not listed
  text "v" at 52.273,83.134 h1.52 r270
  text "v" at 33.934,82.982 h1.52 r270
  text "S" at 16.205,77.114 h1
  text "+" at 11.125,77.089 h1
  text "-" at 13.691,77.089 h1
  text "1B" at 86.919,73.228 h1
  text "1A" at 89.484,73.228 h1
  text "2A" at 91.948,73.228 h1
  text "2B" at 94.615,73.228 h1
  text "1B" at 102.006,73.228 h1
  text "1A" at 104.572,73.228 h1
  text "2A" at 107.036,73.228 h1
  text "2B" at 109.703,73.228 h1
  text "1B" at 117.246,73.228 h1
  text "1A" at 119.812,73.228 h1
  text "2A" at 122.276,73.228 h1
  text "2B" at 124.943,73.228 h1
  text "1B" at 71.653,73.203 h1
  text "1A" at 74.219,73.203 h1
  text "2A" at 76.683,73.203 h1
  text "2B" at 79.35,73.203 h1
  text "1B" at 132.461,73.203 h1
  text "1A" at 135.026,73.203 h1
  text "2A" at 137.49,73.203 h1
  text "2B" at 140.157,73.203 h1
  text "1B" at 56.388,73.177 h1
  text "1A" at 58.953,73.177 h1
  text "2A" at 61.417,73.177 h1
  text "2B" at 64.084,73.177 h1
  text "v" at 42.342,64.389 h1.52 r90
  text "alone" at 51.765,64.262 h1 r90
  text "Stand" at 50.283,64.186 h1 r90
  text "Endstops" at 10.617,59.944 h1
  text "T0" at 17.704,54.229 h1
  text "USB" at 50.292,52.019 h1 r90
  text "Power" at 51.587,51.206 h1 r90
  text "v" at 63.602,49.581 h1.52 r270
  text "T1" at 17.837,48.92 h1
  text "HB" at 134.722,48.641 h1
  text "1B Black" at 78.156,47.727 h1
  text "1A Green" at 78.156,46.169 h1
  text "2A Red" at 78.156,44.611 h1
  text "T2" at 17.882,43.713 h1
  text "2B Blue" at 78.156,43.053 h1
  text "v" at 36.754,40.919 h1.52
  text "HE0" at 50.775,39.954 h1
  text "HE1" at 59.03,39.954 h1
  text "HE2" at 66.98,39.954 h1
  text "FAN1" at 83.363,39.954 h1
  text "FAN0" at 74.803,39.929 h1
  text "_" at 42.277,39.047 h1
  text "T3" at 17.831,38.71 h1
  text "+" at 42.277,35.796 h1
  text "THB" at 17.831,33.757 h1
  text "_" at 43.739,33.172 h1
  text "12V-Select" at 88.849,32.156 h1 r90
  text "12V-Select" at 71.704,32.131 h1 r90
  text "12V-Select" at 80.137,32.131 h1 r90
  text "+" at 43.739,29.921 h1
  text "USB" at 13.716,29.845 h1
  text "11A" at 126.06,26.873 h1
  text "5A" at 110.795,25.629 h1
  text "PWR" at 88.849,20.701 h1 r90
  text "PWR" at 71.704,20.65 h1 r90
  text "PWR" at 80.137,20.65 h1 r90
  text "v" at 21.361,18.009 h1.52 r180
  text "_" at 42.012,14.808 h1
  text "12V..35V" at 106.401,12.598 h1 r90
  text "+" at 42.012,11.557 h1
  text "-" at 47.796,10.541 h2
  text "-" at 81.4,10.541 h2
  text "-" at 64.56,10.49 h2
  text "-" at 72.891,10.49 h2
  text "-" at 56.178,10.465 h2
  text "+" at 51.428,10.414 h2
  text "+" at 85.033,10.414 h2
  text "+" at 68.192,10.363 h2
  text "+" at 76.524,10.363 h2
  text "+" at 59.81,10.338 h2
  text "-" at 108.839,10.287 h2
  text "+" at 113.919,10.287 h2
  text "-" at 118.836,10.287 h2
  text "+" at 123.916,10.287 h2
  text "-" at 128.869,10.287 h2
  text "+" at 133.949,10.287 h2
Bottom Overlay:
  lines w0.203: 66.396,36.373 90.602,36.373 ; 66.624,51.486 90.602,51.486
  text "BOARD MODEL" at 90.576,49.759 h1.02
  text "RUMBA" at 90.449,47.803 h1.4
  text "....................................................." at 90.449,46.99 h0.55 r180
  text "OPEN SORCE" at 90.5,44.933 h1.07
  text "3D PRINTER ELECTRONICS" at 90.5,43.307 h1.02
  text "....................................................." at 90.449,42.494 h0.55 r180
  text "WWW.RUMBA.CC" at 90.5,40.513 h1.02
  text "....................................................." at 90.449,39.649 h0.55 r180
  text "MADE IN CHINA" at 90.5,37.465 h1.02
Top Solder:
  text "RUMBA" at 64.872,46.584 h3.7
Bottom Solder:
  text "RUMBA" at 110.195,30.531 h4

## Dimensions
10,85 to 145,85 on Top Overlay
10,85 to 10,10 on Top Overlay

## Text inside footprints (layer, text, board x,y; h text height)
E0: Mechanical 15 "DIR" at 101.481,54.086 h0.61; Mechanical 15 "STEP" at 101.481,56.626 h0.61; Mechanical 15 "SLP" at 101.481,59.166 h0.61; Mechanical 15 "RST" at 101.481,61.706 h0.61; Mechanical 15 "MS3" at 101.481,64.246 h0.61; Mechanical 15 "MS2" at 101.481,66.786 h0.61; Mechanical 15 "MS1" at 101.481,69.326 h0.61; Mechanical 15 "EN" at 101.481,71.866 h0.61; Mechanical 15 "GND" at 109.516,53.981 h0.61; Mechanical 15 "VDD" at 109.516,56.549 h0.61; Mechanical 15 "1B" at 109.516,59.117 h0.61; Mechanical 15 "1A" at 109.516,61.685 h0.61; Mechanical 15 "2A" at 109.516,64.253 h0.61; Mechanical 15 "2B" at 109.516,66.82 h0.61; Mechanical 15 "GND" at 109.516,69.388 h0.61; Mechanical 15 "Vmot" at 109.516,71.956 h0.61
E1: Mechanical 15 "Vmot" at 124.756,71.956 h0.61; Mechanical 15 "GND" at 124.756,69.388 h0.61; Mechanical 15 "2B" at 124.756,66.82 h0.61; Mechanical 15 "2A" at 124.756,64.253 h0.61; Mechanical 15 "1A" at 124.756,61.685 h0.61; Mechanical 15 "1B" at 124.756,59.117 h0.61; Mechanical 15 "VDD" at 124.756,56.549 h0.61; Mechanical 15 "GND" at 124.756,53.981 h0.61; Mechanical 15 "EN" at 116.721,71.866 h0.61; Mechanical 15 "MS1" at 116.721,69.326 h0.61; Mechanical 15 "MS2" at 116.721,66.786 h0.61; Mechanical 15 "MS3" at 116.721,64.246 h0.61; Mechanical 15 "RST" at 116.721,61.706 h0.61; Mechanical 15 "SLP" at 116.721,59.166 h0.61; Mechanical 15 "STEP" at 116.721,56.626 h0.61; Mechanical 15 "DIR" at 116.721,54.086 h0.61
E2: Mechanical 15 "DIR" at 131.961,54.086 h0.61; Mechanical 15 "STEP" at 131.961,56.626 h0.61; Mechanical 15 "SLP" at 131.961,59.166 h0.61; Mechanical 15 "RST" at 131.961,61.706 h0.61; Mechanical 15 "MS3" at 131.961,64.246 h0.61; Mechanical 15 "MS2" at 131.961,66.786 h0.61; Mechanical 15 "MS1" at 131.961,69.326 h0.61; Mechanical 15 "EN" at 131.961,71.866 h0.61; Mechanical 15 "GND" at 139.996,53.981 h0.61; Mechanical 15 "VDD" at 139.996,56.549 h0.61; Mechanical 15 "1B" at 139.996,59.117 h0.61; Mechanical 15 "1A" at 139.996,61.685 h0.61; Mechanical 15 "2A" at 139.996,64.253 h0.61; Mechanical 15 "2B" at 139.996,66.82 h0.61; Mechanical 15 "GND" at 139.996,69.388 h0.61; Mechanical 15 "Vmot" at 139.996,71.956 h0.61
J2: Mechanical 1 "PCB Edge" at 9.271,27.608 h0.25 r270
X: Mechanical 15 "DIR" at 55.769,54.086 h0.61; Mechanical 15 "STEP" at 55.769,56.626 h0.61; Mechanical 15 "SLP" at 55.769,59.166 h0.61; Mechanical 15 "RST" at 55.769,61.706 h0.61; Mechanical 15 "MS3" at 55.769,64.246 h0.61; Mechanical 15 "MS2" at 55.769,66.786 h0.61; Mechanical 15 "MS1" at 55.769,69.326 h0.61; Mechanical 15 "EN" at 55.769,71.866 h0.61; Mechanical 15 "GND" at 63.804,53.981 h0.61; Mechanical 15 "VDD" at 63.804,56.549 h0.61; Mechanical 15 "1B" at 63.804,59.117 h0.61; Mechanical 15 "1A" at 63.804,61.685 h0.61; Mechanical 15 "2A" at 63.804,64.253 h0.61; Mechanical 15 "2B" at 63.804,66.82 h0.61; Mechanical 15 "GND" at 63.804,69.388 h0.61; Mechanical 15 "Vmot" at 63.804,71.956 h0.61
Y: Mechanical 15 "Vmot" at 79.044,71.956 h0.61; Mechanical 15 "GND" at 79.044,69.388 h0.61; Mechanical 15 "2B" at 79.044,66.82 h0.61; Mechanical 15 "2A" at 79.044,64.253 h0.61; Mechanical 15 "1A" at 79.044,61.685 h0.61; Mechanical 15 "1B" at 79.044,59.117 h0.61; Mechanical 15 "VDD" at 79.044,56.549 h0.61; Mechanical 15 "GND" at 79.044,53.981 h0.61; Mechanical 15 "EN" at 71.009,71.866 h0.61; Mechanical 15 "MS1" at 71.009,69.326 h0.61; Mechanical 15 "MS2" at 71.009,66.786 h0.61; Mechanical 15 "MS3" at 71.009,64.246 h0.61; Mechanical 15 "RST" at 71.009,61.706 h0.61; Mechanical 15 "SLP" at 71.009,59.166 h0.61; Mechanical 15 "STEP" at 71.009,56.626 h0.61; Mechanical 15 "DIR" at 71.009,54.086 h0.61
Z: Mechanical 15 "Vmot" at 94.284,71.956 h0.61; Mechanical 15 "GND" at 94.284,69.388 h0.61; Mechanical 15 "2B" at 94.284,66.82 h0.61; Mechanical 15 "2A" at 94.284,64.253 h0.61; Mechanical 15 "1A" at 94.284,61.685 h0.61; Mechanical 15 "1B" at 94.284,59.117 h0.61; Mechanical 15 "VDD" at 94.284,56.549 h0.61; Mechanical 15 "GND" at 94.284,53.981 h0.61; Mechanical 15 "EN" at 86.249,71.866 h0.61; Mechanical 15 "MS1" at 86.249,69.326 h0.61; Mechanical 15 "MS2" at 86.249,66.786 h0.61; Mechanical 15 "MS3" at 86.249,64.246 h0.61; Mechanical 15 "RST" at 86.249,61.706 h0.61; Mechanical 15 "SLP" at 86.249,59.166 h0.61; Mechanical 15 "STEP" at 86.249,56.626 h0.61; Mechanical 15 "DIR" at 86.249,54.086 h0.61